# EAGLE board I2C_decagon2.2 (EAGLE 9.3.1)
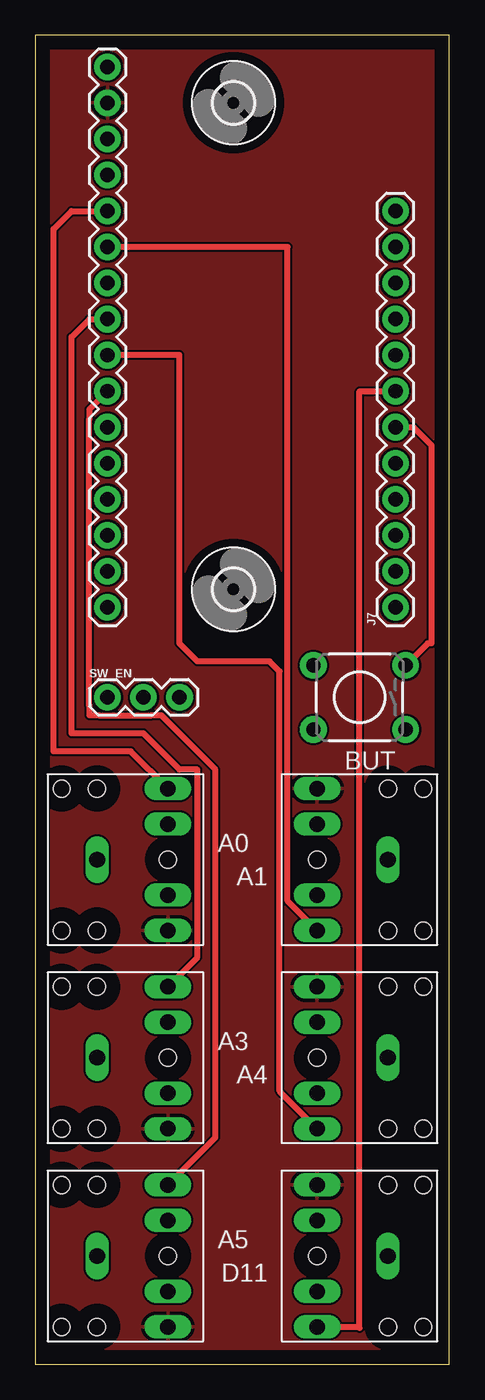
[diagram p0: board, top side]
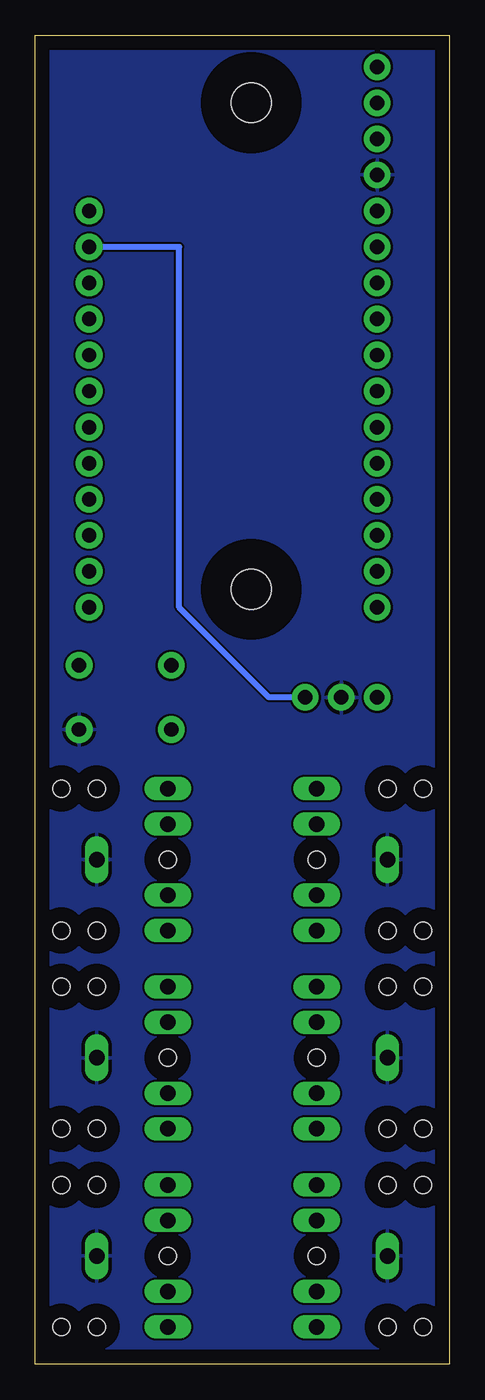
[diagram p1: board, bottom side, seen from below]

Size 29.19 x 93.65 mm. Coordinates in mm from the lower left corner, seen from the top.
Outline: 0,0 29.19,0 29.19,93.65 0,93.65 0,0
Copper layers (1*16): Top 0.035mm / dielectric 1.5mm / Bottom 0.035mm
Design rules "default": minimum track width 6mil, minimum drill 0.35mm, track to track 6mil, track to pad 6mil, pad to pad 6mil, via to via 6mil, smd to smd 6mil, copper to edge 40mil, drill to drill 6mil, minimum pad ring 10mil, minimum via ring 8mil, stop-mask expansion 4mil, vias tented up to drill 0mil, thermal gap 10mil
Net classes: 0 default: width 0.406 mm; 1 ground: width 0.61 mm

## Footprints (pad centres in the part's own frame; a part is rotated, then mirrored left to right if it is on the bottom)
JW-PJ-307-5H = drill 1.1 long: 1 -2,0; 2 3,5; 3 3,2.5; 4 3,-2.5; 5 3,-5 | hole 1.2: -4.5,5; -2,5; 3,0; -4.5,-5; -2,-5
TACTILE-PTH = drill 1.016 pad 1.88: 1 -3.251,2.261; 2 3.251,2.261; 3 -3.251,-2.261; 4 3.251,-2.261
1X16 = drill 1.016 pad 1.88: 1 0,0; 2 2.54,0; 3 5.08,0; 4 7.62,0; 5 10.16,0; 6 12.7,0; 7 15.24,0; 8 17.78,0; 9 20.32,0; 10 22.86,0; 11 25.4,0; 12 27.94,0; 13 30.48,0; 14 33.02,0; 15 35.56,0; 16 38.1,0
1X12 = drill 1.016 pad 1.88: 1 0,0; 2 2.54,0; 3 5.08,0; 4 7.62,0; 5 10.16,0; 6 12.7,0; 7 15.24,0; 8 17.78,0; 9 20.32,0; 10 22.86,0; 11 25.4,0; 12 27.94,0
1X03 = drill 1.016 pad 1.88: 1 0,0; 2 2.54,0; 3 5.08,0
2,8 = hole 2.8: 0,0

## Placement (x,y rotation side)
A0  [JW-PJ-307-5H]  6.35,35.56 0 top
A1  [JW-PJ-307-5H]  22.86,35.56 180 top
A3  [JW-PJ-307-5H]  6.35,21.59 0 top
A4  [JW-PJ-307-5H]  22.86,21.59 180 top
A5  [JW-PJ-307-5H]  6.35,7.62 0 top
BUT  [TACTILE-PTH]  22.86,46.99 180 top
D11  [JW-PJ-307-5H]  22.86,7.62 180 top
FRAME1  FRAME-LETTER  [CREATIVE_COMMONS]  -80.01,30.48 0 top  (outside the outline)
J6  [1X16]  5.08,53.34 90 top
J7  [1X12]  25.4,53.34 90 top
SW_EN  455-1750-1-ND  [1X03]  5.08,46.99 0 top
U$1  [2,8]  13.97,88.9 0 top
U$2  [2,8]  13.97,54.61 0 top

## Library data of the parts
A0 A1 A3-A5 D11 = jack
BUT = SparkFun-Retired
FRAME1 = SparkFun-Aesthetics
J6 J7 = SparkFun-Connectors
SW_EN = SparkFun-Connectors; PROD_ID: XXX-00000
U$1 U$2 = holes

## Nets
A0: A0.2 J6.12
A1: A1.2 J6.11
A2: J6.10
A3: A3.2 J6.9
A4: A4.2 J6.8
A5: A5.2 J6.7
AREF: J6.14
BAT: J7.12
CHNL_SCAN: BUT.3 J7.6
D5: J7.3
D6: J7.4
D9: J7.5
D11: D11.2 J7.7
D12: J7.8
D13: J7.9
EN: J7.11 SW_EN.3
GND: A0.1 A1.1 A3.1 A4.1 A5.1 BUT.1 D11.1 J6.13 SW_EN.2
MISO: J6.4
MOSI: J6.5
N$3: SW_EN.1
RST: J6.16
RX: J6.3
SCK: J6.6
SCL: J7.2
SDA: J7.1
SPEC: J6.1
TX: J6.2
USB: J7.10
VCC: A0.5 A1.5 A3.5 A4.5 A5.5 D11.5 J6.15

## Tracks (layer width: path | path; a pad name or v marks a point on that pad's centre or on a via)
A0
  Top 0.406: A0.2 6.73,43.18 1.27,43.18 1.27,80.01 2.54,81.28 J6.12
A1
  Top 0.406: A1.2 17.78,32.64 17.78,78.74 J6.11
A3
  Top 0.406: A3.2 11.43,28.67 11.43,41.91 10.16,41.91 7.62,44.45 2.54,44.45 2.54,72.39 3.81,73.66 J6.9
A4
  Top 0.406: A4.2 17.22,19.23 17.22,48.82 16.51,49.53 11.43,49.53 10.16,50.8 10.16,71.12 J6.8
A5
  Top 0.406: A5.2 12.7,15.97 12.7,41.91 8.89,45.72 8.18,45.72 8.16,45.7 4.54,45.7 4.52,45.72 3.81,45.72 3.81,46.43 3.79,46.45 3.79,66.58 3.81,66.6 3.81,67.31 J6.7
CHNL_SCAN
  Top 0.406: J7.6 26.67,66.04 27.94,64.77 27.94,50.8 27.66,50.8 BUT.3
D11
  Top 0.406: D11.2 22.78,2.62 22.86,2.54 22.86,68.58 J7.7
EN
  Bottom 0.406: SW_EN.3 12.7,46.99 19.05,53.34 19.05,78.74 J7.11
GND
  pour Bottom: 0,93.98 0,0 29.21,0 29.21,93.98
VCC
  pour Top: 0,93.98 0,0 29.21,0 29.21,92.71 27.94,93.98